# Altium PCB AICat V1.7 双面板 板厚1.6mm_lrd.PcbDoc (part 3 of 6)
Units mm, origin at the board's own origin, x right, y up, seen from the top; angles counter-clockwise.
Board outline 63.83 x 43.59 mm, 2 copper layers (Top Layer, Bottom Layer); 123 components, 84 nets, 332 pads, 255 vias.
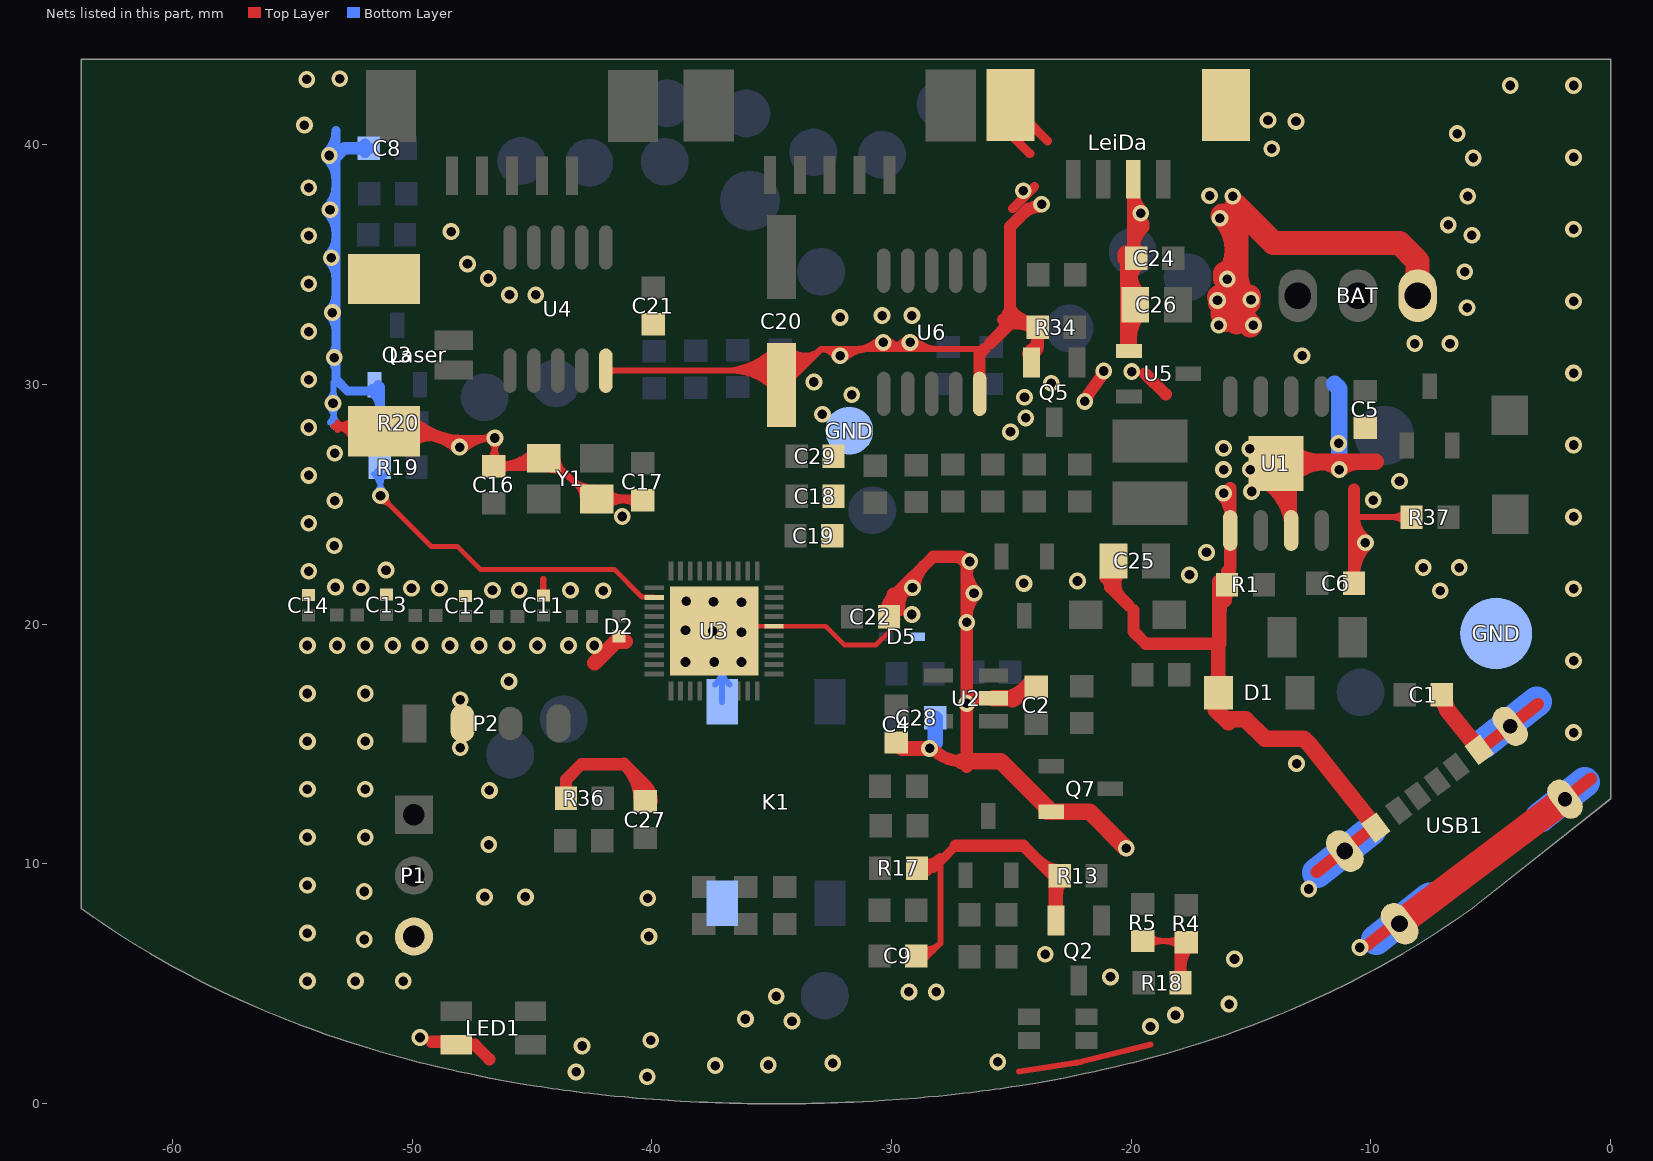
[diagram p3: the nets of this part, all layers, seen from the top]

## Via types
v1: diameter 0.7, hole 0.4, Top Layer to Bottom Layer, tented both sides, 255 vias

## Nets (pads, with @x,y where several pads share a name; then routed paths per layer and width w, separated by ;. In a path a pad name is that pad's centre, name@x,y a point inside that pad or via, vN(x,y) a via of type N, cw(c..) or ccw(c..) an arc to the next point about the centre after c; other vN are vias at no path point) (continued)
GND: BAT.1 C1.1 C2.1 C4.1 C5.2 C6.1 C8.2 C9.1 C11.1 C12.1 C13.1 C14.1 C16.1 C17.1 C18.2 C19.2 C20.2 C21.1 C22.1 C24.1 C25.2 C26.2 C27.1 C28.1 C29.1 D1.1 D2.2 D5.2 GND.1 K1.1 K1.2 Laser.3 Laser.4 LED1.1 LeiDa.2 LeiDa.5 LeiDa.6 P1.4 P2.2 Q2.2 Q3.2 Q5.2 Q7.2 R1.1 R4.2 R5.2 R13.1 R17.2 R18.1 R20.1 R34.1 R36.2 R37.1 U1.1 U1.3 U1.9 U2.2 U3.16 U3.41 U4.5 U5.1 U6.5 USB1.7 USB1.A12 USB1.B12 Y1.2 Y1.4 | length 794.5
  Top Layer w0.203: U3.41@-35.685,19.833 -35.604,19.914 U3.16@-34.904,19.914 -32.753,19.914 -31.971,19.132 -30.651,19.132 -30.075,19.707 -30.075,20.182 C22.1@-29.957,20.3 ; C22.1@-30.21,20.015 cw(c-30.522,19.695) -30.075,19.695 cw(c-29.848,19.695) C22.1@-29.89,19.918 ; C22.1@-29.906,20.554 C22.1@-29.906,19.927 ; -30.075,19.706 ccw(c-30.318,19.706) -30.234,19.934 cw(c-30.318,19.706) -30.075,19.706 ; -30.075,19.706 cw(c-29.783,19.706) -29.928,19.96 ccw(c-29.783,19.706) -30.075,19.706 ; C22.1@-29.906,19.927 cw(c-29.589,19.927) -29.737,20.208 ccw(c-29.589,19.927) C22.1@-29.906,19.927 ; C22.1@-29.906,19.927 ccw(c-30.223,19.927) -30.075,20.208 cw(c-30.223,19.927) C22.1@-29.906,19.927
  Top Layer w0.254: -49.482,27.768 cw(c-49.482,25.929) v1@-48.182,27.229 ; -48.869,27.768 cw(c-48.869,26.542) v1@-48.002,27.409 ; -48.256,27.768 cw(c-48.256,27.155) v1@-47.823,27.588 ; v1@-48.226,27.588 cw(c-47.792,27.155) -47.792,27.768 ; v1@-48.046,27.409 cw(c-47.179,26.542) -47.179,27.768 ; v1@-47.867,27.229 cw(c-46.566,25.929) v1@-46.566,27.768 ; C16.1@-46.602,26.582 -46.551,26.633 v1(-46.551,27.768) -50.896,27.768 Laser.4@-51.176,28.047 -51.379,28.25 -53.282,28.25 ; C11.1@-44.533,21.203 -44.533,21.878 ; Y1.4@-44.505,26.918 -44.228,26.918 -42.528,25.218 Y1.2@-42.305,25.218 ; U4.5@-41.923,30.575 -34.988,30.575 -34.59,30.177 -34.236,30.177 -32.937,31.476 ; C9.1@-28.568,6.076 -27.958,6.686 ; -27.958,10.111 -27.958,6.686 ; -25.897,31.708 -26.129,31.476 -32.937,31.476 ; -24.671,1.331 -22.095,1.724 ; -22.286,1.697 -19.193,2.459 ; R5.2@-19.525,6.779 -17.747,6.779 R4.2@-17.697,6.729 ; -10.704,24.44 -10.678,24.466 R37.1@-8.307,24.466 ; -53.282,28.25 cw(c-53.282,27.393) Laser.4@-52.484,27.708 ; -53.282,28.25 ccw(c-53.282,29.592) Laser.4@-52.301,28.677 ; -53.282,28.25 cw(c-53.282,27.393) Laser.4@-52.484,27.708 ; -53.282,28.25 ccw(c-53.282,29.592) Laser.4@-52.301,28.677 ; -53.282,28.25 ccw(c-53.282,29.592) Laser.4@-52.301,28.677 ; -53.282,28.25 cw(c-53.282,27.393) Laser.4@-52.484,27.708 ; -53.282,28.25 ccw(c-53.282,29.592) Laser.4@-52.301,28.677 ; -53.282,28.25 cw(c-53.282,27.393) Laser.4@-52.484,27.708 ; -53.282,28.25 ccw(c-53.282,29.592) Laser.4@-52.301,28.677 ; -53.282,28.25 cw(c-53.282,27.393) Laser.4@-52.484,27.708 ; -52.908,28.25 cw(c-52.908,27.54) Laser.4@-52.248,27.801 ; -52.908,28.25 cw(c-52.908,27.54) Laser.4@-52.248,27.801 ; -52.908,28.25 cw(c-52.908,27.54) Laser.4@-52.248,27.801 ; -52.908,28.25 cw(c-52.908,27.54) Laser.4@-52.248,27.801 ; -52.908,28.25 cw(c-52.908,27.54) Laser.4@-52.248,27.801 ; -52.744,28.25 cw(c-52.744,28.789) -53.124,28.408 ccw(c-52.744,28.789) -52.744,28.25 ; -52.744,28.25 ccw(c-52.744,27.712) -53.124,28.093 cw(c-52.744,27.712) -52.744,28.25 ; -52.698,28.25 ccw(c-52.698,29.047) Laser.4@-52.115,28.504 ; -52.698,28.25 ccw(c-52.698,29.047) Laser.4@-52.115,28.504 ; -52.698,28.25 ccw(c-52.698,29.047) Laser.4@-52.115,28.504 ; -52.698,28.25 ccw(c-52.698,29.047) Laser.4@-52.115,28.504 ; -52.698,28.25 ccw(c-52.698,29.047) Laser.4@-52.115,28.504 ; Laser.4@-50.612,28.161 ccw(c-49.662,29.111) -49.662,27.768 ; Laser.4@-50.612,28.161 ccw(c-49.662,29.111) -49.662,27.768 ; Laser.4@-50.612,28.161 ccw(c-49.662,29.111) -49.662,27.768 ; Laser.4@-50.612,28.161 ccw(c-49.662,29.111) -49.662,27.768 ; Laser.4@-50.612,28.161 ccw(c-49.662,29.111) -49.662,27.768 ; Laser.4@-50.433,28.341 ccw(c-49.049,29.724) -49.049,27.768 ; Laser.4@-50.433,28.341 ccw(c-49.049,29.724) -49.049,27.768 ; Laser.4@-50.433,28.341 ccw(c-49.049,29.724) -49.049,27.768 ; Laser.4@-50.433,28.341 ccw(c-49.049,29.724) -49.049,27.768 ; Laser.4@-50.433,28.341 ccw(c-49.049,29.724) -49.049,27.768 ; Laser.4@-50.253,28.52 ccw(c-48.436,30.337) -48.436,27.768 ; Laser.4@-50.253,28.52 ccw(c-48.436,30.337) -48.436,27.768 ; Laser.4@-50.253,28.52 ccw(c-48.436,30.337) -48.436,27.768 ; Laser.4@-50.253,28.52 ccw(c-48.436,30.337) -48.436,27.768 ; Laser.4@-50.253,28.52 ccw(c-48.436,30.337) -48.436,27.768 ; Laser.4@-50.073,27.395 cw(c-49.173,26.494) -49.173,27.768 ; Laser.4@-50.073,27.395 cw(c-49.173,26.494) -49.173,27.768 ; Laser.4@-50.073,27.395 cw(c-49.173,26.494) -49.173,27.768 ; Laser.4@-50.073,27.395 cw(c-49.173,26.494) -49.173,27.768 ; Laser.4@-50.073,27.395 cw(c-49.173,26.494) -49.173,27.768 ; Laser.4@-50.073,28.7 ccw(c-47.823,30.95) -47.823,27.768 ; Laser.4@-50.073,28.7 ccw(c-47.823,30.95) -47.823,27.768 ; Laser.4@-50.073,28.7 ccw(c-47.823,30.95) -47.823,27.768 ; Laser.4@-50.073,28.7 ccw(c-47.823,30.95) -47.823,27.768 ; Laser.4@-50.073,28.7 ccw(c-47.823,30.95) -47.823,27.768 ; -47.089,27.768 cw(c-47.089,27.229) v1@-46.709,27.61 ; -47.089,27.768 ccw(c-47.089,28.306) v1@-46.709,27.925 ; -47.089,27.768 cw(c-47.089,27.229) v1@-46.709,27.61 ; -47.089,27.768 ccw(c-47.089,28.306) v1@-46.709,27.925 ; -47.089,27.768 ccw(c-47.089,28.306) v1@-46.709,27.925 ; -47.089,27.768 cw(c-47.089,27.229) v1@-46.709,27.61 ; -47.089,27.768 ccw(c-47.089,28.306) v1@-46.709,27.925 ; -47.089,27.768 cw(c-47.089,27.229) v1@-46.709,27.61 ; -47.089,27.768 ccw(c-47.089,28.306) v1@-46.709,27.925 ; -47.089,27.768 cw(c-47.089,27.229) v1@-46.709,27.61 ; C16.1@-46.816,26.821 ccw(c-47.455,27.46) v1@-46.551,27.46 ; C16.1@-46.816,26.821 ccw(c-47.455,27.46) v1@-46.551,27.46 ; C16.1@-46.816,26.821 ccw(c-47.455,27.46) v1@-46.551,27.46 ; C16.1@-46.816,26.821 ccw(c-47.455,27.46) v1@-46.551,27.46 ; C16.1@-46.816,26.821 ccw(c-47.455,27.46) v1@-46.551,27.46 ; v1@-46.709,27.61 cw(c-47.089,27.229) -46.551,27.229 ; v1@-46.709,27.61 cw(c-47.089,27.229) -46.551,27.229 ; v1@-46.709,27.61 cw(c-47.089,27.229) -46.551,27.229 ; v1@-46.709,27.61 cw(c-47.089,27.229) -46.551,27.229 ; v1@-46.709,27.61 cw(c-47.089,27.229) -46.551,27.229 ; -46.551,27.229 cw(c-46.013,27.229) v1@-46.393,27.61 ; -46.551,27.229 cw(c-46.013,27.229) v1@-46.393,27.61 ; -46.551,27.229 cw(c-46.013,27.229) v1@-46.393,27.61 ; -46.551,27.229 cw(c-46.013,27.229) v1@-46.393,27.61 ; -46.551,27.229 cw(c-46.013,27.229) v1@-46.393,27.61 ; -46.551,27.336 ccw(c-45.823,27.336) C16.1@-46.338,26.821 ; -46.551,27.336 ccw(c-45.823,27.336) C16.1@-46.338,26.821 ; -46.551,27.336 ccw(c-45.823,27.336) C16.1@-46.338,26.821 ; -46.551,27.336 ccw(c-45.823,27.336) C16.1@-46.338,26.821 ; -46.551,27.336 ccw(c-45.823,27.336) C16.1@-46.338,26.821 ; Y1.4@-44.405,26.445 cw(c-44.405,24.876) -43.296,25.986 ; Y1.4@-44.405,26.445 cw(c-44.405,24.876) -43.296,25.986 ; Y1.4@-44.405,26.445 cw(c-44.405,24.876) -43.296,25.986 ; Y1.4@-44.405,26.445 cw(c-44.405,24.876) -43.296,25.986 ; Y1.4@-44.405,26.445 cw(c-44.405,24.876) -43.296,25.986 ; Y1.4@-44.405,26.699 cw(c-44.405,25.744) -43.729,26.419 ; Y1.4@-44.405,26.699 cw(c-44.405,25.744) -43.729,26.419 ; Y1.4@-44.405,26.699 cw(c-44.405,25.744) -43.729,26.419 ; Y1.4@-44.405,26.699 cw(c-44.405,25.744) -43.729,26.419 ; Y1.4@-44.405,26.699 cw(c-44.405,25.744) -43.729,26.419 ; Y1.4@-43.932,26.918 ccw(c-43.217,26.918) -43.722,26.412 ; Y1.4@-43.932,26.918 ccw(c-43.217,26.918) -43.722,26.412 ; Y1.4@-43.932,26.918 ccw(c-43.217,26.918) -43.722,26.412 ; Y1.4@-43.932,26.918 ccw(c-43.217,26.918) -43.722,26.412 ; Y1.4@-43.932,26.918 ccw(c-43.217,26.918) -43.722,26.412 ; -43.423,26.113 ccw(c-42.405,27.131) Y1.2@-42.405,25.691 ; -43.423,26.113 ccw(c-42.405,27.131) Y1.2@-42.405,25.691 ; -43.423,26.113 ccw(c-42.405,27.131) Y1.2@-42.405,25.691 ; -43.423,26.113 ccw(c-42.405,27.131) Y1.2@-42.405,25.691 ; -43.423,26.113 ccw(c-42.405,27.131) Y1.2@-42.405,25.691 ; -43.125,25.815 cw(c-43.722,25.218) Y1.2@-42.878,25.218 ; -43.125,25.815 cw(c-43.722,25.218) Y1.2@-42.878,25.218 ; -43.125,25.815 cw(c-43.722,25.218) Y1.2@-42.878,25.218 ; -43.125,25.815 cw(c-43.722,25.218) Y1.2@-42.878,25.218 ; -43.125,25.815 cw(c-43.722,25.218) Y1.2@-42.878,25.218 ; Y1.2@-42.989,25.679 ccw(c-42.405,26.264) Y1.2@-42.405,25.437 ; Y1.2@-42.989,25.679 ccw(c-42.405,26.264) Y1.2@-42.405,25.437 ; Y1.2@-42.989,25.679 ccw(c-42.405,26.264) Y1.2@-42.405,25.437 ; Y1.2@-42.989,25.679 ccw(c-42.405,26.264) Y1.2@-42.405,25.437 ; Y1.2@-42.989,25.679 ccw(c-42.405,26.264) Y1.2@-42.405,25.437 ; U4.5@-41.815,30.467 cw(c-41.554,30.205) -41.554,30.575 ; U4.5@-41.815,30.467 cw(c-41.554,30.205) -41.554,30.575 ; U4.5@-41.815,30.467 cw(c-41.554,30.205) -41.554,30.575 ; U4.5@-41.815,30.467 cw(c-41.554,30.205) -41.554,30.575 ; U4.5@-41.815,30.467 cw(c-41.554,30.205) -41.554,30.575 ; U4.5@-41.815,30.683 ccw(c-41.554,30.944) -41.554,30.575 ; U4.5@-41.815,30.683 ccw(c-41.554,30.944) -41.554,30.575 ; U4.5@-41.815,30.683 ccw(c-41.554,30.944) -41.554,30.575 ; U4.5@-41.815,30.683 ccw(c-41.554,30.944) -41.554,30.575 ; U4.5@-41.815,30.683 ccw(c-41.554,30.944) -41.554,30.575 ; -36.692,30.575 cw(c-36.692,28.075) C20.2@-34.925,29.843 ; -36.692,30.575 cw(c-36.692,28.075) C20.2@-34.925,29.843 ; -36.692,30.575 cw(c-36.692,28.075) C20.2@-34.925,29.843 ; -36.079,30.575 cw(c-36.079,28.689) C20.2@-34.745,30.022 ; -36.079,30.575 cw(c-36.079,28.689) C20.2@-34.745,30.022 ; -36.079,30.575 cw(c-36.079,28.689) C20.2@-34.745,30.022 ; -35.466,30.575 cw(c-35.466,29.302) C20.2@-34.565,30.202 ; -35.466,30.575 cw(c-35.466,29.302) C20.2@-34.565,30.202 ; -35.466,30.575 cw(c-35.466,29.302) C20.2@-34.565,30.202 ; -32.937,31.476 cw(c-32.937,30.831) v1@-32.351,31.103 ; -32.937,31.476 cw(c-32.937,30.831) v1@-32.351,31.103 ; -32.937,31.476 cw(c-33.605,32.145) -34.262,31.464 ccw(c-33.605,32.145) -32.937,31.476 ; -32.937,31.476 cw(c-32.937,30.831) v1@-32.351,31.103 ; -32.937,31.476 cw(c-32.937,30.831) v1@-32.351,31.103 ; -32.539,31.476 cw(c-32.539,31.016) v1@-32.121,31.21 ; -32.539,31.476 cw(c-32.539,31.016) v1@-32.121,31.21 ; -32.539,31.476 cw(c-32.539,31.016) v1@-32.121,31.21 ; -32.539,31.476 cw(c-32.539,31.016) v1@-32.121,31.21 ; v1@-32.171,31.219 cw(c-31.55,30.597) -31.55,31.476 ; v1@-32.171,31.219 cw(c-31.55,30.597) -31.55,31.476 ; v1@-32.171,31.219 cw(c-31.55,30.597) -31.55,31.476 ; v1@-32.171,31.219 cw(c-31.55,30.597) -31.55,31.476 ; v1@-31.992,31.039 cw(c-30.936,29.984) -30.936,31.476 ; v1@-31.992,31.039 cw(c-30.936,29.984) -30.936,31.476 ; v1@-31.992,31.039 cw(c-30.936,29.984) -30.936,31.476 ; v1@-31.992,31.039 cw(c-30.936,29.984) -30.936,31.476 ; -31.559,31.476 ccw(c-31.559,32.968) v1@-30.504,31.913 ; -31.559,31.476 ccw(c-31.559,32.968) v1@-30.504,31.913 ; -31.559,31.476 ccw(c-31.559,32.968) v1@-30.504,31.913 ; -31.559,31.476 ccw(c-31.559,32.968) v1@-30.504,31.913 ; -30.946,31.476 ccw(c-30.946,32.355) v1@-30.324,31.734 ; -30.946,31.476 ccw(c-30.946,32.355) v1@-30.324,31.734 ; -30.946,31.476 ccw(c-30.946,32.355) v1@-30.324,31.734 ; -30.946,31.476 ccw(c-30.946,32.355) v1@-30.324,31.734 ; v1@-30.441,31.476 ccw(c-30.441,32.968) v1@-29.386,31.913 ; v1@-30.441,31.476 ccw(c-30.441,32.968) v1@-29.386,31.913 ; v1@-30.441,31.476 ccw(c-30.441,32.968) v1@-29.386,31.913 ; v1@-30.441,31.476 ccw(c-30.441,32.968) v1@-29.386,31.913 ; v1@-30.368,31.734 ccw(c-29.746,32.355) -29.746,31.476 ; v1@-30.368,31.734 ccw(c-29.746,32.355) -29.746,31.476 ; v1@-30.368,31.734 ccw(c-29.746,32.355) -29.746,31.476 ; v1@-30.368,31.734 ccw(c-29.746,32.355) -29.746,31.476 ; v1@-30.188,31.913 ccw(c-29.133,32.968) v1@-29.133,31.476 ; v1@-30.188,31.913 ccw(c-29.133,32.968) v1@-29.133,31.476 ; v1@-30.188,31.913 ccw(c-29.133,32.968) v1@-29.133,31.476 ; v1@-30.188,31.913 ccw(c-29.133,32.968) v1@-29.133,31.476 ; -29.828,31.476 ccw(c-29.828,32.355) v1@-29.206,31.734 ; -29.828,31.476 ccw(c-29.828,32.355) v1@-29.206,31.734 ; -29.828,31.476 ccw(c-29.828,32.355) v1@-29.206,31.734 ; -29.828,31.476 ccw(c-29.828,32.355) v1@-29.206,31.734 ; v1@-29.25,31.734 ccw(c-28.629,32.355) -28.629,31.476 ; v1@-29.25,31.734 ccw(c-28.629,32.355) -28.629,31.476 ; v1@-29.25,31.734 ccw(c-28.629,32.355) -28.629,31.476 ; v1@-29.25,31.734 ccw(c-28.629,32.355) -28.629,31.476 ; v1@-29.071,31.913 ccw(c-28.015,32.968) -28.015,31.476 ; v1@-29.071,31.913 ccw(c-28.015,32.968) -28.015,31.476 ; v1@-29.071,31.913 ccw(c-28.015,32.968) -28.015,31.476 ; v1@-29.071,31.913 ccw(c-28.015,32.968) -28.015,31.476 ; -27.958,6.686 cw(c-28.648,7.375) -28.884,6.429 ccw(c-28.648,7.375) -27.958,6.686 ; -27.958,6.686 cw(c-28.581,7.309) -28.86,6.473 ccw(c-28.581,7.309) -27.958,6.686 ; R5.2@-19.261,6.54 cw(c-18.684,5.963) -18.684,6.779 ; R5.2@-19.261,6.54 cw(c-18.684,5.963) -18.684,6.779 ; R5.2@-19.261,6.54 cw(c-18.684,5.963) -18.684,6.779 ; R5.2@-19.261,6.54 cw(c-18.684,5.963) -18.684,6.779 ; R5.2@-19.261,6.54 cw(c-18.684,5.963) -18.684,6.779 ; R5.2@-19.261,7.018 ccw(c-18.684,7.595) -18.684,6.779 ; R5.2@-19.261,7.018 ccw(c-18.684,7.595) -18.684,6.779 ; R5.2@-19.261,7.018 ccw(c-18.684,7.595) -18.684,6.779 ; R5.2@-19.261,7.018 ccw(c-18.684,7.595) -18.684,6.779 ; R5.2@-19.261,7.018 ccw(c-18.684,7.595) -18.684,6.779 ; -18.66,6.779 cw(c-18.66,5.79) R4.2@-17.961,6.49 ; -18.66,6.779 cw(c-18.66,5.79) R4.2@-17.961,6.49 ; -18.66,6.779 cw(c-18.66,5.79) R4.2@-17.961,6.49 ; -18.66,6.779 cw(c-18.66,5.79) R4.2@-17.961,6.49 ; -18.66,6.779 cw(c-18.66,5.79) R4.2@-17.961,6.49 ; -18.415,6.779 ccw(c-18.415,7.422) R4.2@-17.961,6.968 ; -18.415,6.779 ccw(c-18.415,7.422) R4.2@-17.961,6.968 ; -18.415,6.779 ccw(c-18.415,7.422) R4.2@-17.961,6.968 ; -18.415,6.779 ccw(c-18.415,7.422) R4.2@-17.961,6.968 ; -18.415,6.779 ccw(c-18.415,7.422) R4.2@-17.961,6.968 ; -9.123,24.466 cw(c-9.123,23.65) R37.1@-8.546,24.227 ; -9.123,24.466 ccw(c-9.123,25.282) R37.1@-8.546,24.705 ; -9.123,24.466 ccw(c-9.123,25.282) R37.1@-8.546,24.705 ; -9.123,24.466 cw(c-9.123,23.65) R37.1@-8.546,24.227 ; -9.123,24.466 ccw(c-9.123,25.282) R37.1@-8.546,24.705 ; -9.123,24.466 cw(c-9.123,23.65) R37.1@-8.546,24.227 ; -37.058,30.575 ccw(c-37.058,33.592) -34.925,31.459 cw(c-37.058,33.592) -37.058,30.575 ; -36.445,30.575 ccw(c-36.445,32.979) -34.745,31.279 cw(c-36.445,32.979) -36.445,30.575 ; -35.832,30.575 ccw(c-35.832,32.365) -34.565,31.099 cw(c-35.832,32.365) -35.832,30.575 ; -35.218,30.575 ccw(c-35.218,31.752) -34.386,30.92 cw(c-35.218,31.752) -35.218,30.575 ; C20.2@-35.144,30.551 ccw(c-34.503,31.214) -33.851,30.562 cw(c-34.503,31.214) C20.2@-35.144,30.551 ; C20.2@-34.967,30.733 ccw(c-34.323,31.4) -33.668,30.745 cw(c-34.323,31.4) C20.2@-34.967,30.733 ; C20.2@-34.791,30.916 ccw(c-34.144,31.586) -33.485,30.928 cw(c-34.144,31.586) C20.2@-34.791,30.916 ; C20.2@-34.614,31.099 ccw(c-33.964,31.773) -33.302,31.111 cw(c-33.964,31.773) C20.2@-34.614,31.099 ; C20.2@-34.438,31.282 ccw(c-33.785,31.959) -33.119,31.293 cw(c-33.785,31.959) C20.2@-34.438,31.282 ; C9.1@-28.946,6.183 ccw(c-28.775,6.868) -28.276,6.368 cw(c-28.775,6.868) C9.1@-28.946,6.183 ; C9.1@-28.94,6.232 ccw(c-28.727,6.872) -28.249,6.395 cw(c-28.727,6.872) C9.1@-28.94,6.232
  Top Layer w0.381: C16.1@-46.602,26.582 -44.841,26.582 Y1.4@-44.505,26.918 ; Y1.2@-42.305,25.218 -40.428,25.218 C17.1@-40.379,25.169 ; R17.2@-28.941,9.81 -28.259,9.81 -27.958,10.111 -27.319,10.75 ; LeiDa.6@-25.149,40.547 -24.235,39.632 ; -24.951,37.344 -24.036,38.258 ; LeiDa.6@-24.412,41.08 -23.498,40.166 ; C25.2@-20.873,22.154 C25.2@-20.873,22.332 ; C16.1@-46.405,26.582 ccw(c-46.405,28.718) Y1.4@-44.894,27.208 ; C16.1@-46.405,26.582 ccw(c-46.405,28.718) Y1.4@-44.894,27.208 ; C16.1@-46.405,26.582 ccw(c-46.405,28.718) Y1.4@-44.894,27.208 ; C16.1@-46.405,26.582 ccw(c-46.405,28.718) Y1.4@-44.894,27.208 ; C16.1@-46.405,26.582 ccw(c-46.405,28.718) Y1.4@-44.894,27.208 ; C16.1@-46.383,26.388 cw(c-45.914,25.919) -45.914,26.582 ; C16.1@-46.383,26.388 cw(c-45.914,25.919) -45.914,26.582 ; C16.1@-46.383,26.388 cw(c-45.914,25.919) -45.914,26.582 ; C16.1@-46.383,26.388 cw(c-45.914,25.919) -45.914,26.582 ; C16.1@-46.383,26.388 cw(c-45.914,25.919) -45.914,26.582 ; C16.1@-46.383,26.776 ccw(c-45.914,27.245) -45.914,26.582 ; C16.1@-46.383,26.776 ccw(c-45.914,27.245) -45.914,26.582 ; C16.1@-46.383,26.776 ccw(c-45.914,27.245) -45.914,26.582 ; C16.1@-46.383,26.776 ccw(c-45.914,27.245) -45.914,26.582 ; C16.1@-46.383,26.776 ccw(c-45.914,27.245) -45.914,26.582 ; -45.485,26.582 ccw(c-45.485,27.798) Y1.4@-44.625,26.938 ; -45.485,26.582 ccw(c-45.485,27.798) Y1.4@-44.625,26.938 ; -45.485,26.582 ccw(c-45.485,27.798) Y1.4@-44.625,26.938 ; -45.485,26.582 ccw(c-45.485,27.798) Y1.4@-44.625,26.938 ; -45.485,26.582 ccw(c-45.485,27.798) Y1.4@-44.625,26.938 ; Y1.2@-41.915,24.928 cw(c-41.216,24.229) -41.216,25.218 ; Y1.2@-41.915,24.928 cw(c-41.216,24.229) -41.216,25.218 ; Y1.2@-41.915,24.928 cw(c-41.216,24.229) -41.216,25.218 ; Y1.2@-41.915,24.928 cw(c-41.216,24.229) -41.216,25.218 ; Y1.2@-41.915,24.928 cw(c-41.216,24.229) -41.216,25.218 ; Y1.2@-41.915,25.508 ccw(c-41.216,26.207) -41.216,25.218 ; Y1.2@-41.915,25.508 ccw(c-41.216,26.207) -41.216,25.218 ; Y1.2@-41.915,25.508 ccw(c-41.216,26.207) -41.216,25.218 ; Y1.2@-41.915,25.508 ccw(c-41.216,26.207) -41.216,25.218 ; Y1.2@-41.915,25.508 ccw(c-41.216,26.207) -41.216,25.218 ; -41.185,25.218 cw(c-41.185,24.388) C17.1@-40.598,24.975 ; -41.185,25.218 cw(c-41.185,24.388) C17.1@-40.598,24.975 ; -41.185,25.218 cw(c-41.185,24.388) C17.1@-40.598,24.975 ; -41.185,25.218 cw(c-41.185,24.388) C17.1@-40.598,24.975 ; -41.185,25.218 cw(c-41.185,24.388) C17.1@-40.598,24.975 ; -40.948,25.218 ccw(c-40.948,25.713) C17.1@-40.598,25.363 ; -40.948,25.218 ccw(c-40.948,25.713) C17.1@-40.598,25.363 ; -40.948,25.218 ccw(c-40.948,25.713) C17.1@-40.598,25.363 ; -40.948,25.218 ccw(c-40.948,25.713) C17.1@-40.598,25.363 ; -40.948,25.218 ccw(c-40.948,25.713) C17.1@-40.598,25.363 ; -27.972,10.254 cw(c-28.615,10.897) -28.865,10.023 ccw(c-28.615,10.897) -27.972,10.254 ; -27.972,10.254 cw(c-28.553,10.835) -28.844,10.066 ccw(c-28.553,10.835) -27.972,10.254 ; R17.2@-28.979,9.71 ccw(c-28.782,10.23) -28.389,9.837 cw(c-28.782,10.23) R17.2@-28.979,9.71 ; R17.2@-28.97,9.656 ccw(c-28.818,10.186) -28.429,9.796 cw(c-28.818,10.186) R17.2@-28.97,9.656
  Top Layer w0.508: -49.197,2.574 -48.293,2.574 LED1.1@-48.166,2.447 -47.39,2.447 -46.79,1.847 ; R36.2@-43.587,12.731 -43.587,13.51 -42.944,14.153 -41.141,14.153 -40.277,13.29 C27.1@-40.277,12.612 ; -29.906,21.223 -29.855,21.223 -28.263,22.815 -27.171,22.815 ; R17.2@-28.941,9.734 R17.2@-28.542,9.734 ; -27.319,10.75 -24.504,10.75 -23.259,9.505 R13.1@-22.988,9.505 ; -26.866,14.052 -26.866,14.279 -26.866,14.484 ; -26.841,14.509 -26.866,14.484 ; v1@-26.841,16.947 v1@-26.79,16.897 ; v1@-26.781,16.905 U2.2@-25.744,16.905 ; U6.5@-26.328,29.61 -26.328,31.278 -26.129,31.476 ; -25.897,31.708 -25.063,32.543 ; -24.301,37.344 -25.063,36.582 -25.063,32.543 ; Q5.2@-24.158,31.024 -24.158,31.329 -23.902,31.585 ; -21.761,29.622 v1@-21.176,30.435 ; C25.2@-20.873,22.332 -20.873,21.546 ; C25.2@-20.58,22.033 ccw(c-19.85,21.674) -20.425,21.098 ; -20.11,20.783 -20.873,21.546 ; -19.916,36.149 cw(c-18.61,36.149) v1@-19.534,37.072 ; -19.916,36.906 ccw(c-19.836,36.906) -19.893,36.849 ; -19.916,37.375 cw(c-19.836,37.375) -19.893,37.432 ; LeiDa.2@-19.916,38.132 ccw(c-18.61,38.132) v1@-19.534,37.208 ; LeiDa.2@-19.916,38.664 -19.916,35.39 C24.1@-19.787,35.261 ; -19.906,20.58 -19.906,19.691 -19.398,19.183 -16.325,19.183 ; -19.422,30.456 -18.558,29.592 ; R18.1@-17.943,5.035 -17.943,6.483 R4.2@-17.697,6.729 ; -16.011,22.205 -15.868,22.348 ; U1.1@-15.868,24.491 U1.1@-15.868,23.907 ; -15.868,25.685 U1.1@-15.868,23.907 ; U1.9@-13.963,26.701 -13.328,26.066 U1.3@-13.328,23.907 ; -12.273,9.655 USB1.B12@-10.036,11.42 ; C6.1@-10.704,21.697 -10.704,24.44 ; -10.704,25.617 -10.704,24.44 ; v1@-10.127,6.615 -7.89,8.381 ; USB1.A12@-5.261,14.903 -3.024,16.669 ; -3.049,11.791 -0.812,13.556 ; R36.2@-43.736,12.905 ccw(c-44.097,13.265) -43.587,13.265 ; R36.2@-43.736,12.905 ccw(c-44.097,13.265) -43.587,13.265 ; R36.2@-43.736,12.905 ccw(c-44.097,13.265) -43.587,13.265 ; R36.2@-43.736,12.905 ccw(c-44.097,13.265) -43.587,13.265 ; -43.587,13.265 ccw(c-43.078,13.265) R36.2@-43.438,12.905 ; -43.587,13.265 ccw(c-43.078,13.265) R36.2@-43.438,12.905 ; -43.587,13.265 ccw(c-43.078,13.265) R36.2@-43.438,12.905 ; -43.587,13.265 ccw(c-43.078,13.265) R36.2@-43.438,12.905 ; -41.159,14.172 cw(c-42.719,12.612) C27.1@-40.513,12.612 ; -41.159,14.172 cw(c-42.719,12.612) C27.1@-40.513,12.612 ; -41.159,14.172 cw(c-42.719,12.612) C27.1@-40.513,12.612 ; -41.159,14.172 cw(c-42.719,12.612) C27.1@-40.513,12.612 ; C27.1@-40.426,12.761 ccw(c-40.787,13.121) -40.277,13.121 ; C27.1@-40.426,12.761 ccw(c-40.787,13.121) -40.277,13.121 ; C27.1@-40.426,12.761 ccw(c-40.787,13.121) -40.277,13.121 ; C27.1@-40.426,12.761 ccw(c-40.787,13.121) -40.277,13.121 ; -40.292,13.305 cw(c-40.985,12.612) C27.1@-40.005,12.612 ; -40.292,13.305 cw(c-40.985,12.612) C27.1@-40.005,12.612 ; -40.292,13.305 cw(c-40.985,12.612) C27.1@-40.005,12.612 ; -40.292,13.305 cw(c-40.985,12.612) C27.1@-40.005,12.612 ; -40.277,13.121 ccw(c-39.768,13.121) C27.1@-40.128,12.761 ; -40.277,13.121 ccw(c-39.768,13.121) C27.1@-40.128,12.761 ; -40.277,13.121 ccw(c-39.768,13.121) C27.1@-40.128,12.761 ; -40.277,13.121 ccw(c-39.768,13.121) C27.1@-40.128,12.761 ; -27.461,22.815 cw(c-27.461,21.889) v1@-26.807,22.544 ; -27.461,22.815 cw(c-27.461,21.889) v1@-26.807,22.544 ; -27.461,22.815 cw(c-27.461,21.889) v1@-26.807,22.544 ; -27.461,22.815 cw(c-27.461,21.889) v1@-26.807,22.544 ; -27.171,22.815 cw(c-27.171,22.45) v1@-26.829,22.578 ; -27.171,22.815 cw(c-27.171,22.45) v1@-26.829,22.578 ; -27.171,22.815 cw(c-27.171,22.45) v1@-26.829,22.578 ; -27.171,22.815 cw(c-27.171,22.45) v1@-26.829,22.578 ; -27.171,22.815 -26.866,22.51 v1(-26.866,20.072) v1(-26.866,16.693) -26.866,14.484 ; -27.07,14.279 cw(c-27.07,15.934) -28.342,14.875 ccw(c-27.07,15.934) -27.07,14.279 ; -27.07,14.279 -26.866,14.484 ; v1@-26.866,20.323 cw(c-25.594,20.323) v1@-26.493,21.223 ; v1@-26.866,20.323 cw(c-25.594,20.323) v1@-26.493,21.223 ; v1@-26.866,20.323 cw(c-25.594,20.323) v1@-26.493,21.223 ; -26.866,21.032 ccw(c-26.82,21.032) -26.853,20.999 ; -26.866,21.032 ccw(c-26.82,21.032) -26.853,20.999 ; -26.866,21.032 ccw(c-26.82,21.032) -26.853,20.999 ; -26.866,21.55 cw(c-26.82,21.55) -26.853,21.582 ; -26.866,21.55 cw(c-26.82,21.55) -26.853,21.582 ; -26.866,21.55 cw(c-26.82,21.55) -26.853,21.582 ; -26.866,22.073 cw(c-26.201,22.073) v1@-26.671,22.544 ; -26.866,22.073 cw(c-26.201,22.073) v1@-26.671,22.544 ; -26.866,22.073 cw(c-26.201,22.073) v1@-26.671,22.544 ; -26.866,22.073 cw(c-26.201,22.073) v1@-26.671,22.544 ; -26.866,22.258 ccw(c-25.594,22.258) v1@-26.493,21.359 ; -26.866,22.258 ccw(c-25.594,22.258) v1@-26.493,21.359 ; -26.866,22.258 ccw(c-25.594,22.258) v1@-26.493,21.359 ; v1@-26.798,16.625 cw(c-26.123,15.951) U2.2@-26.123,16.905 ; v1@-26.798,16.625 cw(c-26.123,15.951) U2.2@-26.123,16.905 ; v1@-26.798,16.625 cw(c-26.123,15.951) U2.2@-26.123,16.905 ; -25.488,32.117 ccw(c-26.346,32.975) -25.133,32.975 ; -25.488,32.117 ccw(c-26.346,32.975) -25.133,32.975 ; -25.488,32.117 ccw(c-26.346,32.975) -25.133,32.975 ; -25.352,32.709 ccw(c-24.995,33.011) -24.995,32.543 ; -25.352,32.709 ccw(c-24.995,33.011) -24.995,32.543 ; -25.352,32.709 ccw(c-24.995,33.011) -24.995,32.543 ; -25.063,32.543 R34.1@-23.902,32.543 ; -24.964,33.037 ccw(c-23.902,33.931) R34.1@-23.902,32.543 ; -24.964,33.037 ccw(c-23.902,33.931) R34.1@-23.902,32.543 ; -24.964,33.037 ccw(c-23.902,33.931) R34.1@-23.902,32.543 ; -24.719,32.543 cw(c-24.719,31.599) R34.1@-24.051,32.266 ; -24.719,32.543 cw(c-24.719,31.599) R34.1@-24.051,32.266 ; -24.719,32.543 cw(c-24.719,31.599) R34.1@-24.051,32.266 ; -24.719,32.543 cw(c-24.719,31.599) R34.1@-24.051,32.266 ; -24.719,32.543 cw(c-24.719,31.599) R34.1@-24.051,32.266 ; Q5.2@-24.226,31.266 ccw(c-25.009,32.048) R34.1@-23.902,32.048 ; Q5.2@-24.226,31.266 ccw(c-25.009,32.048) R34.1@-23.902,32.048 ; Q5.2@-24.226,31.266 ccw(c-25.009,32.048) R34.1@-23.902,32.048 ; Q5.2@-24.226,31.266 ccw(c-25.009,32.048) R34.1@-23.902,32.048 ; Q5.2@-24.226,31.266 ccw(c-25.009,32.048) R34.1@-23.902,32.048 ; Q5.2@-24.168,31.293 ccw(c-24.196,31.585) -23.902,31.585 ; Q5.2@-24.168,31.293 ccw(c-24.196,31.585) -23.902,31.585 ; Q5.2@-24.168,31.293 ccw(c-24.196,31.585) -23.902,31.585 ; Q5.2@-24.168,31.293 ccw(c-24.196,31.585) -23.902,31.585 ; Q5.2@-24.168,31.293 ccw(c-24.196,31.585) -23.902,31.585 ; Q5.2@-24.062,31.198 cw(c-23.515,31.199) -23.902,31.585 ; Q5.2@-24.062,31.198 cw(c-23.515,31.199) -23.902,31.585 ; Q5.2@-24.062,31.198 cw(c-23.515,31.199) -23.902,31.585 ; Q5.2@-24.062,31.198 cw(c-23.515,31.199) -23.902,31.585 ; Q5.2@-24.062,31.198 cw(c-23.515,31.199) -23.902,31.585 ; R34.1@-24.051,32.216 cw(c-24.412,31.856) -23.902,31.856 ; R34.1@-24.051,32.216 cw(c-24.412,31.856) -23.902,31.856 ; R34.1@-24.051,32.216 cw(c-24.412,31.856) -23.902,31.856 ; R34.1@-24.051,32.216 cw(c-24.412,31.856) -23.902,31.856 ; R34.1@-24.051,32.216 cw(c-24.412,31.856) -23.902,31.856 ; -23.902,31.585 R34.1@-23.902,32.543 ; -23.902,31.856 cw(c-23.393,31.856) R34.1@-23.753,32.216 ; -23.902,31.856 cw(c-23.393,31.856) R34.1@-23.753,32.216 ; -23.902,31.856 cw(c-23.393,31.856) R34.1@-23.753,32.216 ; -23.902,31.856 cw(c-23.393,31.856) R34.1@-23.753,32.216 ; -23.902,31.856 cw(c-23.393,31.856) R34.1@-23.753,32.216 ; -23.854,10.1 ccw(c-22.988,10.966) R13.1@-22.988,9.741 ; -23.854,10.1 ccw(c-22.988,10.966) R13.1@-22.988,9.741 ; -23.854,10.1 ccw(c-22.988,10.966) R13.1@-22.988,9.741 ; -23.854,10.1 ccw(c-22.988,10.966) R13.1@-22.988,9.741 ; -20.873,21.537 cw(c-19.987,21.537) C25.2@-20.542,22.228 ; -20.873,21.537 cw(c-19.987,21.537) C25.2@-20.542,22.228 ; -20.873,21.537 cw(c-19.987,21.537) C25.2@-20.542,22.228 ; -20.873,21.537 cw(c-19.987,21.537) C25.2@-20.542,22.228 ; -20.873,21.546 ccw(c-21.321,21.546) -21.061,21.911 cw(c-21.321,21.546) -20.873,21.546 ; -20.873,21.546 cw(c-20.424,21.546) -20.684,21.911 ccw(c-20.424,21.546) -20.873,21.546 ; C24.1@-19.916,35.518 cw(c-18.436,35.518) -19.483,36.564 ; C24.1@-19.916,35.518 cw(c-18.436,35.518) -19.483,36.564 ; C24.1@-19.916,35.518 cw(c-18.436,35.518) -19.483,36.564 ; -19.916,36.107 ccw(c-18.967,36.107) C24.1@-19.638,35.435 ; -19.916,36.107 ccw(c-18.967,36.107) C24.1@-19.638,35.435 ; -19.916,36.107 ccw(c-18.967,36.107) C24.1@-19.638,35.435 ; -19.916,36.107 ccw(c-18.967,36.107) C24.1@-19.638,35.435 ; -19.916,36.107 ccw(c-18.967,36.107) C24.1@-19.638,35.435 ; -19.916,36.52 ccw(c-19.663,36.52) -19.842,36.341 ; -19.916,36.52 ccw(c-19.663,36.52) -19.842,36.341 ; -19.916,36.52 ccw(c-19.663,36.52) -19.842,36.341 ; -19.916,36.744 cw(c-19.663,36.744) v1@-19.842,36.924 ; -19.916,36.744 cw(c-19.663,36.744) v1@-19.842,36.924 ; -19.916,36.744 cw(c-19.663,36.744) v1@-19.842,36.924 ; -19.916,37.747 ccw(c-18.436,37.747) -19.483,36.7 ; -19.916,37.747 ccw(c-18.436,37.747) -19.483,36.7 ; -19.916,37.747 ccw(c-18.436,37.747) -19.483,36.7 ; -17.943,5.569 ccw(c-17.433,5.569) -17.793,5.209 cw(c-17.433,5.569) -17.943,5.569 ; -17.943,5.569 cw(c-18.452,5.569) -18.092,5.209 ccw(c-18.452,5.569) -17.943,5.569 ; v1@-16.215,25.388 cw(c-17.054,24.55) U1.1@-15.868,24.55 ; v1@-16.215,25.388 cw(c-17.054,24.55) U1.1@-15.868,24.55 ; v1@-16.215,25.388 cw(c-17.054,24.55) U1.1@-15.868,24.55 ; v1@-16.215,25.388 cw(c-17.054,24.55) U1.1@-15.868,24.55 ; R1.1@-16.152,21.821 ccw(c-16.838,22.507) -15.868,22.507 ; R1.1@-16.152,21.821 ccw(c-16.838,22.507) -15.868,22.507 ; R1.1@-16.152,21.821 ccw(c-16.838,22.507) -15.868,22.507 ; R1.1@-16.152,21.821 ccw(c-16.838,22.507) -15.868,22.507 ; R1.1@-16.152,21.821 ccw(c-16.838,22.507) -15.868,22.507 ; R1.1@-16.126,21.842 ccw(c-16.492,22.348) -15.868,22.348 ; R1.1@-16.126,21.842 ccw(c-16.492,22.348) -15.868,22.348 ; R1.1@-16.126,21.842 ccw(c-16.492,22.348) -15.868,22.348 ; R1.1@-16.126,21.842 ccw(c-16.492,22.348) -15.868,22.348 ; R1.1@-16.126,21.842 ccw(c-16.492,22.348) -15.868,22.348 ; -15.868,22.348 U1.1@-15.868,23.907 ; U1.9@-14.461,25.956 cw(c-15.878,23.836) U1.3@-13.328,23.836 ; U1.9@-14.461,25.956 cw(c-15.878,23.836) U1.3@-13.328,23.836 ; U1.9@-14.461,25.956 cw(c-15.878,23.836) U1.3@-13.328,23.836 ; U1.9@-14.461,25.956 cw(c-15.878,23.836) U1.3@-13.328,23.836 ; U1.9@-14.461,25.956 cw(c-15.878,23.836) U1.3@-13.328,23.836 ; U1.9@-14.178,26.378 cw(c-15.243,24.787) -13.328,24.787 ; U1.9@-14.178,26.378 cw(c-15.243,24.787) -13.328,24.787 ; U1.9@-14.178,26.378 cw(c-15.243,24.787) -13.328,24.787 ; U1.9@-14.178,26.378 cw(c-15.243,24.787) -13.328,24.787 ; U1.9@-14.178,26.378 cw(c-15.243,24.787) -13.328,24.787 ; U1.9@-13.896,26.801 cw(c-14.607,25.737) U1.9@-13.328,25.737 ; U1.9@-13.896,26.801 cw(c-14.607,25.737) U1.9@-13.328,25.737 ; U1.9@-13.896,26.801 cw(c-14.607,25.737) U1.9@-13.328,25.737 ; U1.9@-13.896,26.801 cw(c-14.607,25.737) U1.9@-13.328,25.737 ; U1.9@-13.896,26.801 cw(c-14.607,25.737) U1.9@-13.328,25.737 ; C6.1@-10.853,21.871 ccw(c-11.213,22.232) -10.704,22.232 ; C6.1@-10.853,21.871 ccw(c-11.213,22.232) -10.704,22.232 ; C6.1@-10.853,21.871 ccw(c-11.213,22.232) -10.704,22.232 ; C6.1@-10.853,21.871 ccw(c-11.213,22.232) -10.704,22.232 ; C6.1@-10.853,21.871 ccw(c-11.213,22.232) -10.704,22.232 ; -10.704,22.232 ccw(c-10.194,22.232) C6.1@-10.554,21.871 ; -10.704,22.232 ccw(c-10.194,22.232) C6.1@-10.554,21.871 ; -10.704,22.232 ccw(c-10.194,22.232) C6.1@-10.554,21.871 ; -10.704,22.232 ccw(c-10.194,22.232) C6.1@-10.554,21.871 ; -10.704,22.232 ccw(c-10.194,22.232) C6.1@-10.554,21.871 ; -10.704,24.44 ccw(c-9.564,24.44) -10.177,23.48 cw(c-9.564,24.44) -10.704,24.44 ; C22.1@-30.203,20.579 cw(c-29.489,20.579) -29.994,21.084 ccw(c-29.489,20.579) C22.1@-30.203,20.579 ; -30.028,21.05 cw(c-29.127,20.149) -29.127,21.423 ccw(c-29.127,20.149) -30.028,21.05 ; C22.1@-29.695,20.579 cw(c-27.755,20.579) -29.127,21.951 ccw(c-27.755,20.579) C22.1@-29.695,20.579 ; v1@-29.031,21.519 cw(c-27.756,21.519) -28.657,22.42 ccw(c-27.756,21.519) v1@-29.031,21.519 ; -24.556,37.088 cw(c-23.742,36.274) -23.742,37.425 ccw(c-23.742,36.274) -24.556,37.088 ; -24.491,37.153 cw(c-23.826,36.488) -23.75,37.426 ccw(c-23.826,36.488) -24.491,37.153 ; v1@-21.844,29.307 cw(c-21.452,29.371) -21.774,29.603 ccw(c-21.452,29.371) v1@-21.844,29.307 ; -21.318,30.237 ccw(c-21.655,30.479) -21.246,30.546 cw(c-21.655,30.479) -21.318,30.237 ; -17.943,5.686 cw(c-16.679,5.686) -17.572,6.579 ccw(c-16.679,5.686) -17.943,5.686 ; C6.1@-10.704,22.021 cw(c-8.852,22.021) -10.161,23.331 ccw(c-8.852,22.021) C6.1@-10.704,22.021 ; -10.704,23.248 cw(c-10.078,23.248) -10.52,23.69 ccw(c-10.078,23.248) -10.704,23.248 ; -10.704,23.513 ccw(c-10.156,23.513) -10.451,23.052 cw(c-10.156,23.513) -10.704,23.513
  Top Layer w0.6: C22.1@-30.073,20.442 ccw(c-30.478,20.846) -29.906,20.846 ; C22.1@-29.906,20.554 -29.906,21.223 ; -24.874,16.905 -24.24,17.54 C2.1@-23.97,17.54 ; Q2.2@-23.142,7.631 -23.142,9.351 R13.1@-22.988,9.505 ; D1.1@-16.376,17.379 -16.376,19.183 ; -16.325,19.183 R1.1@-16.325,21.773 ; U2.2@-25.444,16.905 ccw(c-25.444,18.281) -24.471,17.308 ; U2.2@-25.444,16.905 ccw(c-25.444,18.281) -24.471,17.308 ; U2.2@-25.444,16.905 ccw(c-25.444,18.281) -24.471,17.308 ; U2.2@-25.444,16.905 ccw(c-25.444,18.281) -24.471,17.308 ; U2.2@-25.444,16.905 ccw(c-25.444,18.281) -24.471,17.308 ; -24.954,16.825 cw(c-23.995,15.866) C2.1@-23.995,17.222 ; -24.954,16.825 cw(c-23.995,15.866) C2.1@-23.995,17.222 ; -24.954,16.825 cw(c-23.995,15.866) C2.1@-23.995,17.222 ; -24.954,16.825 cw(c-23.995,15.866) C2.1@-23.995,17.222 ; -23.142,8.709 cw(c-22.216,8.709) R13.1@-22.871,9.363 ; -23.142,8.709 cw(c-22.216,8.709) R13.1@-22.871,9.363 ; -23.142,8.709 cw(c-22.216,8.709) R13.1@-22.871,9.363 ; -23.142,8.709 cw(c-22.216,8.709) R13.1@-22.871,9.363 ; -23.142,8.709 cw(c-22.216,8.709) R13.1@-22.871,9.363 ; D1.1@-16.572,17.447 ccw(c-17.046,17.921) -16.376,17.921 ; D1.1@-16.572,17.447 ccw(c-17.046,17.921) -16.376,17.921 ; D1.1@-16.572,17.447 ccw(c-17.046,17.921) -16.376,17.921 ; -16.376,17.997 ccw(c-15.598,17.997) D1.1@-16.148,17.447 ; -16.376,17.997 ccw(c-15.598,17.997) D1.1@-16.148,17.447 ; -16.376,17.997 ccw(c-15.598,17.997) D1.1@-16.148,17.447 ; -16.325,20.445 cw(c-14.827,20.445) R1.1@-15.886,21.505 ; -16.325,20.445 cw(c-14.827,20.445) R1.1@-15.886,21.505 ; -16.325,20.445 cw(c-14.827,20.445) R1.1@-15.886,21.505 ; R1.1@-15.886,21.505 ccw(c-15.378,20.997) -16.096,20.997 cw(c-15.378,20.997) R1.1@-15.886,21.505 ; C22.1@-30.226,20.442 ccw(c-30.998,21.214) -29.906,21.214 cw(c-30.998,21.214) C22.1@-30.226,20.442
  Top Layer w0.635: -42.396,18.382 -41.501,19.277 -41.098,19.277 ; C4.1@-29.812,15.06 -29.566,14.814 v1(-28.415,14.814)
  Top Layer w0.7: -27.07,14.279 -26.866,14.279 -25.447,14.279 Q7.2@-23.343,12.175 -21.738,12.175 v1(-20.211,10.648) ; U2.2@-25.744,16.905 -24.874,16.905 ; Q5.2@-24.209,31.278 Q5.2@-24.08,31.408 ; C24.1@-20.219,35.261 C24.1@-20.219,35.456 ; U5.1@-20.11,31.626 C24.1@-20.11,35.21 ; D1.1@-16.462,17.135 -16.462,16.424 -15.944,15.906 -15.823,16.027 -15.227,16.027 -14.42,15.22 -12.805,15.22 -12.548,14.963 USB1.B12@-9.795,11.506 ; U1.9@-13.175,26.777 -9.797,26.777 ; -6.831,16.45 USB1.A12@-5.482,14.756 ; -23.659,12.491 cw(c-23.975,12.175) Q7.2@-23.528,12.175 ; -23.659,12.491 cw(c-23.975,12.175) Q7.2@-23.528,12.175 ; -23.659,12.491 cw(c-23.975,12.175) Q7.2@-23.528,12.175 ; -20.11,31.948 cw(c-18.604,31.948) C26.2@-19.669,33.013 ; -20.11,31.948 cw(c-18.604,31.948) C26.2@-19.669,33.013 ; -20.11,31.948 cw(c-18.604,31.948) C26.2@-19.669,33.013 ; -20.11,31.948 cw(c-18.604,31.948) C26.2@-19.669,33.013 ; -20.11,31.948 cw(c-18.604,31.948) C26.2@-19.669,33.013 ; -20.11,34.18 cw(c-18.732,34.18) C24.1@-19.706,35.154 ; -20.11,34.18 cw(c-18.732,34.18) C24.1@-19.706,35.154 ; -20.11,34.18 cw(c-18.732,34.18) C24.1@-19.706,35.154 ; -20.11,34.18 cw(c-18.732,34.18) C24.1@-19.706,35.154 ; -20.11,34.18 cw(c-18.732,34.18) C24.1@-19.706,35.154 ; -20.11,34.713 ccw(c-18.604,34.713) C26.2@-19.669,33.648 ; -20.11,34.713 ccw(c-18.604,34.713) C26.2@-19.669,33.648 ; -20.11,34.713 ccw(c-18.604,34.713) C26.2@-19.669,33.648 ; -20.11,34.713 ccw(c-18.604,34.713) C26.2@-19.669,33.648 ; -20.11,34.713 ccw(c-18.604,34.713) C26.2@-19.669,33.648 ; -16.462,16.415 cw(c-15.99,16.415) D1.1@-16.232,16.82 ; -16.462,16.415 cw(c-15.99,16.415) D1.1@-16.232,16.82 ; -16.462,16.415 cw(c-15.99,16.415) D1.1@-16.232,16.82 ; U1.9@-13.397,26.135 cw(c-11.847,24.586) -11.847,26.777 ; U1.9@-13.397,26.135 cw(c-11.847,24.586) -11.847,26.777 ; U1.9@-13.397,26.135 cw(c-11.847,24.586) -11.847,26.777 ; U1.9@-13.397,26.135 cw(c-11.847,24.586) -11.847,26.777 ; U1.9@-13.397,26.135 cw(c-11.847,24.586) -11.847,26.777 ; U1.9@-13.397,27.267 ccw(c-12.215,28.448) -12.215,26.777 ; U1.9@-13.397,27.267 ccw(c-12.215,28.448) -12.215,26.777 ; U1.9@-13.397,27.267 ccw(c-12.215,28.448) -12.215,26.777 ; U1.9@-13.397,27.267 ccw(c-12.215,28.448) -12.215,26.777 ; U1.9@-13.397,27.267 ccw(c-12.215,28.448) -12.215,26.777 ; v1(-11.321,26.447) cw(c-10.524,25.65) -10.524,26.777 ccw(c-10.524,25.65) v1(-11.321,26.447) ; v1(-11.321,26.447) ccw(c-12.118,25.65) -12.118,26.777 cw(c-12.118,25.65) v1(-11.321,26.447) ; C1.1@-6.932,17.011 ccw(c-6.014,16.907) -6.737,16.332 ; C1.1@-6.932,17.011 ccw(c-6.014,16.907) -6.737,16.332 ; C1.1@-6.932,17.011 ccw(c-6.014,16.907) -6.737,16.332
  Top Layer w1: -16.197,32.945 cw(c-16.013,31.839) -15.22,32.632 ; v1@-16.092,34.418 ccw(c-17.246,35.572) -15.614,35.572 ; v1@-16.092,34.63 cw(c-17.246,33.476) -15.614,33.476 ; -16.067,32.691 ccw(c-17.16,33.784) -15.614,33.784 ; -15.614,32.894 cw(c-14.415,32.894) v1@-15.263,33.741 ; -15.614,33.862 ccw(c-13.634,33.862) v1@-15.034,32.462 ; -15.614,34.377 ccw(c-14.415,34.377) v1@-15.263,33.529 ; -15.461,32.873 -15.614,33.026 -15.614,37.445 -14.064,35.896 -8.807,35.896 -8.047,35.136 BAT.1@-8.047,33.707 ; v1@-16.348,33.648 cw(c-16.752,32.585) -15.614,32.585 ; v1@-16.348,33.648 cw(c-16.752,32.585) -15.614,32.585 ; v1@-16.348,33.648 cw(c-16.752,32.585) -15.614,32.585 ; v1@-16.348,33.648 cw(c-16.752,32.585) -15.614,32.585 ; v1@-16.295,33.402 ccw(c-17.94,35.047) -15.614,35.047 ; v1@-16.295,33.402 ccw(c-17.94,35.047) -15.614,35.047 ; v1@-16.295,33.402 ccw(c-17.94,35.047) -15.614,35.047 ; v1@-16.295,33.402 ccw(c-17.94,35.047) -15.614,35.047 ; v1@-15.889,34.291 ccw(c-16.552,34.955) -15.614,34.955 ; v1@-15.889,34.291 ccw(c-16.552,34.955) -15.614,34.955 ; v1@-15.889,34.291 ccw(c-16.552,34.955) -15.614,34.955 ; v1@-15.889,34.291 ccw(c-16.552,34.955) -15.614,34.955 ; v1@-15.889,34.503 cw(c-16.552,33.839) -15.614,33.839 ; v1@-15.889,34.503 cw(c-16.552,33.839) -15.614,33.839 ; v1@-15.889,34.503 cw(c-16.552,33.839) -15.614,33.839 ; v1@-15.889,34.503 cw(c-16.552,33.839) -15.614,33.839 ; -15.614,32.74 cw(c-14.549,32.74) v1@-15.079,33.664 ; -15.614,32.74 cw(c-14.549,32.74) v1@-15.079,33.664 ; -15.614,32.74 cw(c-14.549,32.74) v1@-15.079,33.664 ; -15.614,32.74 cw(c-14.549,32.74) v1@-15.079,33.664 ; -15.614,34.643 ccw(c-13.895,34.643) v1@-15.11,33.428 ; -15.614,34.643 ccw(c-13.895,34.643) v1@-15.11,33.428 ; -15.614,34.643 ccw(c-13.895,34.643) v1@-15.11,33.428 ; -15.614,34.643 ccw(c-13.895,34.643) v1@-15.11,33.428 ; v1@-16.194,37.043 cw(c-17.593,35.644) -15.614,35.644 ccw(c-17.593,35.644) v1@-16.194,37.043
  Top Layer w1.143: USB1.7@-8.531,7.718 USB1.7@-1.901,12.696
  Bottom Layer w0.254: -53.282,28.25 -53.282,30.105 -53.18,30.206 ; v1(-37.407,18.421) -37.069,18.082 ; K1.1@-37.069,16.759 -37.069,18.082 ; v1@-53.465,29.058 cw(c-53.907,28.616) -53.282,28.616 ; v1@-53.465,29.058 cw(c-53.907,28.616) -53.282,28.616 ; v1@-53.465,29.058 cw(c-53.907,28.616) -53.282,28.616 ; v1@-53.465,29.373 ccw(c-53.907,29.815) -53.282,29.815 ; v1@-53.465,29.373 ccw(c-53.907,29.815) -53.282,29.815 ; v1@-53.465,29.373 ccw(c-53.907,29.815) -53.282,29.815 ; -53.282,28.739 cw(c-52.83,28.739) v1@-53.15,29.058 ; -53.282,28.739 cw(c-52.83,28.739) v1@-53.15,29.058 ; -53.282,28.739 cw(c-52.83,28.739) v1@-53.15,29.058 ; -53.282,28.789 cw(c-53.82,28.789) -53.44,28.408 ccw(c-53.82,28.789) -53.282,28.789 ; -53.282,28.789 ccw(c-52.744,28.789) -53.124,28.408 cw(c-52.744,28.789) -53.282,28.789 ; -53.282,29.693 ccw(c-52.83,29.693) v1@-53.15,29.373 ; -53.282,29.693 ccw(c-52.83,29.693) v1@-53.15,29.373 ; -53.282,29.693 ccw(c-52.83,29.693) v1@-53.15,29.373 ; K1.1@-37.375,17.483 ccw(c-37.807,18.082) -37.069,18.082 ; K1.1@-37.375,17.483 ccw(c-37.807,18.082) -37.069,18.082 ; K1.1@-37.375,17.483 ccw(c-37.807,18.082) -37.069,18.082 ; K1.1@-37.375,17.483 ccw(c-37.807,18.082) -37.069,18.082 ; -37.069,18.082 ccw(c-36.33,18.082) K1.1@-36.762,17.483 ; -37.069,18.082 ccw(c-36.33,18.082) K1.1@-36.762,17.483 ; -37.069,18.082 ccw(c-36.33,18.082) K1.1@-36.762,17.483 ; -37.069,18.082 ccw(c-36.33,18.082) K1.1@-36.762,17.483
  Bottom Layer w0.381: -51.93,29.724 ccw(c-51.93,30.113) Q3.2@-51.655,29.838 ; Q3.2@-51.655,29.683 cw(c-52.428,28.909) -51.334,28.909 ; R20.1@-51.334,28.403 -51.334,29.905 -51.425,29.995 -51.696,29.724 -52.698,29.724 -53.18,30.206 -53.18,39.503 -53.18,40.595 ; v1@-53.547,37.18 cw(c-54.433,36.294) -53.18,36.294 ; v1@-53.547,37.18 cw(c-54.433,36.294) -53.18,36.294 ; v1@-53.547,37.18 cw(c-54.433,36.294) -53.18,36.294 ; v1@-53.547,37.406 ccw(c-54.433,38.291) -53.18,38.291 ; v1@-53.547,37.406 ccw(c-54.433,38.291) -53.18,38.291 ; v1@-53.547,37.406 ccw(c-54.433,38.291) -53.18,38.291 ; v1@-53.496,35.173 cw(c-54.259,34.411) -53.18,34.411 ; v1@-53.496,35.173 cw(c-54.259,34.411) -53.18,34.411 ; v1@-53.496,35.173 cw(c-54.259,34.411) -53.18,34.411 ; v1@-53.496,35.399 ccw(c-54.259,36.162) -53.18,36.162 ; v1@-53.496,35.399 ccw(c-54.259,36.162) -53.18,36.162 ; v1@-53.496,35.399 ccw(c-54.259,36.162) -53.18,36.162 ; v1@-53.446,32.887 cw(c-54.086,32.247) -53.18,32.247 ; v1@-53.446,32.887 cw(c-54.086,32.247) -53.18,32.247 ; v1@-53.446,32.887 cw(c-54.086,32.247) -53.18,32.247 ; v1@-53.446,33.113 ccw(c-54.086,33.753) -53.18,33.753 ; v1@-53.446,33.113 ccw(c-54.086,33.753) -53.18,33.753 ; v1@-53.446,33.113 ccw(c-54.086,33.753) -53.18,33.753 ; v1@-53.369,31.008 cw(c-53.826,30.552) -53.18,30.552 ; v1@-53.369,31.008 cw(c-53.826,30.552) -53.18,30.552 ; v1@-53.369,31.008 cw(c-53.826,30.552) -53.18,30.552 ; v1@-53.369,31.233 ccw(c-53.826,31.69) -53.18,31.69 ; v1@-53.369,31.233 ccw(c-53.826,31.69) -53.18,31.69 ; v1@-53.369,31.233 ccw(c-53.826,31.69) -53.18,31.69 ; -53.18,40.595 cw(c-54.476,40.595) -53.571,39.668 ccw(c-54.476,40.595) -53.18,40.595 ; Q3.2@-51.778,29.724 ccw(c-51.778,30.113) Q3.2@-51.502,29.838 ; Q3.2@-51.778,29.724 ccw(c-51.778,30.113) Q3.2@-51.502,29.838 ; Q3.2@-51.778,29.724 ccw(c-51.778,30.113) Q3.2@-51.502,29.838 ; Q3.2@-51.778,29.724 ccw(c-51.778,30.113) Q3.2@-51.502,29.838 ; R20.1@-51.528,28.622 ccw(c-51.997,29.09) -51.334,29.09 ; R20.1@-51.528,28.622 ccw(c-51.997,29.09) -51.334,29.09 ; R20.1@-51.528,28.622 ccw(c-51.997,29.09) -51.334,29.09 ; R20.1@-51.528,28.622 ccw(c-51.997,29.09) -51.334,29.09 ; R20.1@-51.528,28.622 ccw(c-51.997,29.09) -51.334,29.09 ; Q3.2@-51.502,29.683 cw(c-51.908,29.277) -51.334,29.277 ; Q3.2@-51.502,29.683 cw(c-51.908,29.277) -51.334,29.277 ; Q3.2@-51.502,29.683 cw(c-51.908,29.277) -51.334,29.277 ; Q3.2@-51.502,29.683 cw(c-51.908,29.277) -51.334,29.277 ; -51.334,29.09 ccw(c-50.671,29.09) R20.1@-51.14,28.622 ; -51.334,29.09 ccw(c-50.671,29.09) R20.1@-51.14,28.622 ; -51.334,29.09 ccw(c-50.671,29.09) R20.1@-51.14,28.622 ; -51.334,29.09 ccw(c-50.671,29.09) R20.1@-51.14,28.622 ; -51.334,29.09 ccw(c-50.671,29.09) R20.1@-51.14,28.622 ; v1@-53.573,39.441 cw(c-54.519,38.494) -53.18,38.494 ccw(c-54.519,38.494) v1@-53.573,39.441
  Bottom Layer w0.508: v1@-53.18,39.503 -52.825,39.858 ; C8.2@-51.817,39.858 -52.825,39.858 ; -52.825,39.858 cw(c-53.347,40.381) -53.447,39.648 ccw(c-53.347,40.381) -52.825,39.858 ; -52.326,39.858 cw(c-52.326,39.349) C8.2@-51.966,39.709 ; -52.326,39.858 ccw(c-52.326,40.368) C8.2@-51.966,40.007 ; -52.326,39.858 cw(c-52.326,39.349) C8.2@-51.966,39.709 ; -52.326,39.858 ccw(c-52.326,40.368) C8.2@-51.966,40.007 ; -52.326,39.858 ccw(c-52.326,40.368) C8.2@-51.966,40.007 ; -52.326,39.858 cw(c-52.326,39.349) C8.2@-51.966,39.709 ; -52.326,39.858 ccw(c-52.326,40.368) C8.2@-51.966,40.007 ; -52.326,39.858 cw(c-52.326,39.349) C8.2@-51.966,39.709
  Bottom Layer w0.635: v1(-28.415,14.814) -28.179,15.05 C28.1@-28.179,16.084
  Bottom Layer w0.7: -11.524,30.028 -11.321,29.825 v1(-11.321,26.447)
  Bottom Layer w1.27: -12.241,9.621 -10.004,11.387 ; -9.785,6.823 -7.548,8.588 ; -5.315,14.999 -3.079,16.765 ; -2.928,11.943 -1.07,13.409
  other v1: -40.196,1.118 -43.165,1.316 -37.356,1.58 -35.146,1.606 -32.454,1.682 -25.571,1.733 -42.914,2.398 -40.054,2.64 -49.678,2.751 -19.195,3.206 -34.156,3.435 -36.099,3.523 -18.154,3.689 -15.919,4.146 -34.816,4.476 -29.279,4.654 -28.136,4.654 -54.374,5.106 -52.374,5.106 -50.374,5.106 -20.867,5.281 -15.69,6.025 -23.589,6.229 -10.458,6.508 -52,6.842 -40.125,6.965 -54.374,7.106 -40.176,8.565 -46.983,8.616 -45.281,8.616 -52,8.842 -12.591,8.946 -54.374,9.106 -46.805,10.801 -54.374,11.106 -51.961,11.106 -46.78,13.061 -54.374,13.106 -51.961,13.106 -13.099,14.179 -48,14.842 -54.374,15.106 -51.961,15.106 -1.542,15.474 -48,16.842 -54.374,17.106 -51.961,17.106 -45.967,17.608 -38.601,18.421 -36.264,18.421 -1.542,18.474 -54.374,19.106 -53.13,19.106 -51.961,19.106 -50.818,19.106 -49.675,19.106 -48.431,19.106 -47.211,19.106 -46.043,19.106 -44.773,19.106 -43.478,19.106 -42.411,19.106 -36.264,19.665 -37.454,19.714 -38.601,19.741 -29.152,20.402 -36.264,20.91 -37.432,20.935 -38.575,20.961 -26.561,21.291 -42.03,21.392 -7.105,21.392 -46.653,21.418 -45.535,21.418 -43.401,21.418 -1.542,21.474 -50.031,21.494 -48.862,21.494 -52.139,21.519 -29.127,21.519 -53.206,21.545 -24.478,21.697 -22.243,21.799 -17.57,22.053 -54.323,22.205 -51.098,22.256 -7.816,22.358 -6.317,22.358 -26.739,22.612 -16.858,22.993 -53.257,23.272 -10.229,23.399 -54.323,24.205 -1.542,24.474 -41.242,24.491 -53.231,25.152 -9.899,25.177 -16.147,25.456 -14.979,25.533 -8.807,25.964 -54.323,26.205 -16.147,26.447 -15.03,26.447 -53.231,27.133 -15.055,27.311 -16.147,27.336 -48.024,27.387 -1.542,27.474 -11.347,27.539 -25.037,28.022 -54.323,28.205 -24.402,28.606 -32.886,28.758 -53.307,29.216 -21.938,29.292 -24.453,29.47 -31.667,29.571 -23.335,30.054 -33.241,30.105 -54.323,30.205 -1.542,30.474 -19.983,30.536 -21.151,30.562 -53.257,31.121 -32.149,31.197 -12.871,31.197 -8.172,31.705 -6.698,31.705 -30.346,31.756 -29.228,31.756 -54.323,32.205 -16.35,32.467 -14.903,32.467 -32.149,32.797 -30.397,32.873 -29.152,32.873 -53.333,33 -5.987,33.203 -1.542,33.474 -16.401,33.508 -15.004,33.534 -45.941,33.737 -44.849,33.737 -54.323,34.205 -15.995,34.397 -46.83,34.423 -6.089,34.702 -47.694,35.032 -53.384,35.286 -54.323,36.205 -5.784,36.226 -48.38,36.378 -1.542,36.474 -6.775,36.658 -16.3,36.937 -19.602,37.14 -53.434,37.293 -23.742,37.521 -15.766,37.852 -5.962,37.852 -16.731,37.877 -24.504,38.08 -54.323,38.205 -5.733,39.452 -1.542,39.474 -53.46,39.553 -14.141,39.833 -6.394,40.468 -54.501,40.823 -13.125,40.976 -14.293,41.027 -4.187,42.474 -1.542,42.474 -54.4,42.728 -53.028,42.754
JIGUANG_CON: R19.2 U3.32 | length 32.7
  Top Layer w0.203: v1(-51.326,25.355) -49.218,23.247 -48.126,23.247 -47.161,22.281 -41.565,22.281 -40.417,21.133 -39.922,21.133 U3.32@-39.903,21.114 ; v1@-51.326,25.106 cw(c-51.326,24.507) -50.902,24.931 ; v1@-51.326,25.106 cw(c-51.326,24.507) -50.902,24.931 ; v1@-51.326,25.106 cw(c-51.326,24.507) -50.902,24.931 ; v1@-51.326,25.106 cw(c-51.326,24.507) -50.902,24.931 ; v1@-51.326,25.106 cw(c-51.326,24.507) -50.902,24.931 ; v1@-51.078,25.355 ccw(c-50.478,25.355) -50.902,24.931 ; v1@-51.078,25.355 ccw(c-50.478,25.355) -50.902,24.931 ; v1@-51.078,25.355 ccw(c-50.478,25.355) -50.902,24.931 ; v1@-51.078,25.355 ccw(c-50.478,25.355) -50.902,24.931 ; v1@-51.078,25.355 ccw(c-50.478,25.355) -50.902,24.931
  Bottom Layer w0.203: R19.2@-51.36,26.549 -51.326,26.515 v1(-51.326,25.355) ; R19.2@-51.617,26.267 cw(c-52.318,25.566) v1@-51.326,25.566 ; R19.2@-51.617,26.267 cw(c-52.318,25.566) v1@-51.326,25.566 ; R19.2@-51.617,26.267 cw(c-52.318,25.566) v1@-51.326,25.566 ; R19.2@-51.617,26.267 cw(c-52.318,25.566) v1@-51.326,25.566 ; R19.2@-51.617,26.267 cw(c-52.318,25.566) v1@-51.326,25.566 ; v1@-51.502,25.53 ccw(c-51.926,25.954) -51.326,25.954 ; v1@-51.502,25.53 ccw(c-51.926,25.954) -51.326,25.954 ; v1@-51.502,25.53 ccw(c-51.926,25.954) -51.326,25.954 ; v1@-51.502,25.53 ccw(c-51.926,25.954) -51.326,25.954 ; v1@-51.502,25.53 ccw(c-51.926,25.954) -51.326,25.954 ; R19.2@-51.473,26.41 cw(c-51.827,26.056) -51.326,26.056 ; R19.2@-51.473,26.41 cw(c-51.827,26.056) -51.326,26.056 ; R19.2@-51.473,26.41 cw(c-51.827,26.056) -51.326,26.056 ; R19.2@-51.473,26.41 cw(c-51.827,26.056) -51.326,26.056 ; R19.2@-51.473,26.41 cw(c-51.827,26.056) -51.326,26.056 ; -51.326,25.727 cw(c-50.563,25.727) R19.2@-51.103,26.267 ; -51.326,25.727 cw(c-50.563,25.727) R19.2@-51.103,26.267 ; -51.326,25.727 cw(c-50.563,25.727) R19.2@-51.103,26.267 ; -51.326,25.727 cw(c-50.563,25.727) R19.2@-51.103,26.267 ; -51.326,25.727 cw(c-50.563,25.727) R19.2@-51.103,26.267 ; -51.326,25.954 ccw(c-50.727,25.954) v1@-51.151,25.53 ; -51.326,25.954 ccw(c-50.727,25.954) v1@-51.151,25.53 ; -51.326,25.954 ccw(c-50.727,25.954) v1@-51.151,25.53 ; -51.326,25.954 ccw(c-50.727,25.954) v1@-51.151,25.53 ; -51.326,25.954 ccw(c-50.727,25.954) v1@-51.151,25.53